# Altium PCB SmartTape.PcbDoc (part 2 of 2)
Units mm, origin at the board's own origin, x right, y up, seen from the top; angles counter-clockwise.
Board outline 81 x 35 mm, 2 copper layers (Top Layer, Bottom Layer), stack 1.57 mm thick; 71 components, 53 nets, 304 pads, 117 vias.
Unrouted connection lines stored in the file: 67.
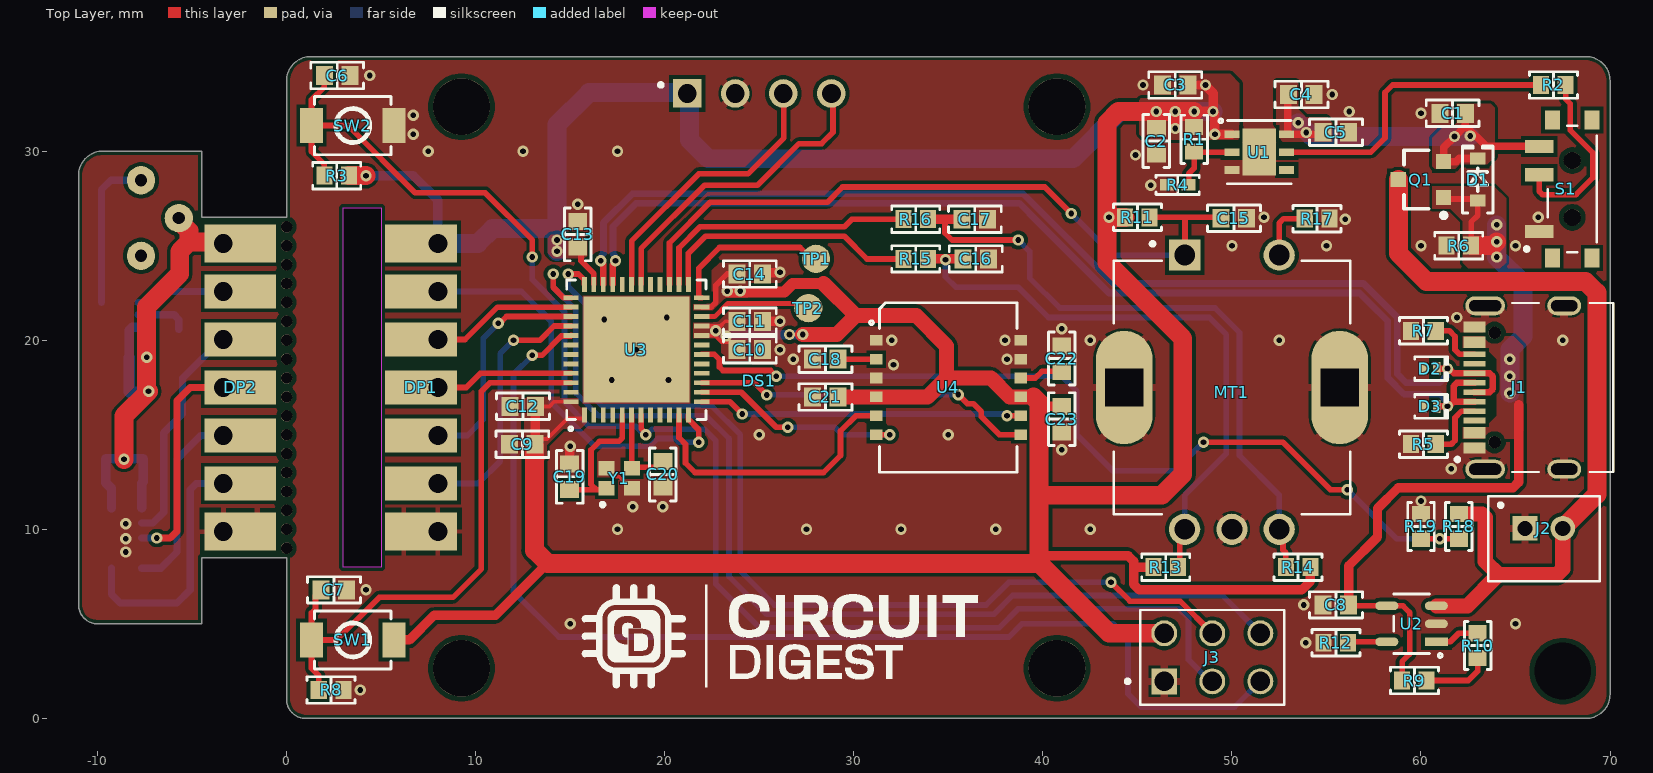
[diagram p0: Top Layer view]

## Via types
v1: diameter 0.6, hole 0.3, Top Layer to Bottom Layer, tented both sides, 117 vias

## Nets (pads, with @x,y where several pads share a name; then routed paths per layer and width w, separated by ;. In a path a pad name is that pad's centre, name@x,y a point inside that pad or via, vN(x,y) a via of type N, cw(c..) or ccw(c..) an arc to the next point about the centre after c; other vN are vias at no path point) (continued)
USB_D_P: (continued)
  Top Layer w0.35: v1(16.614,24.207) 16.614,24.139 16.75,24.004 U3.34 ; D2.2 v1(61.4,18.5) 61.481,18.5 61.731,18.25 J1.B6 63.624,18.25 63.8,18.074 63.8,17.426 63.624,17.25 J1.A6
  Bottom Layer w0.35: v1(16.614,24.207) 16.662,24.254 16.662,24.488 16.762,24.587 16.762,26.219 18.293,27.75 38.957,27.75 43.707,23 56.957,23 58.75,21.207 58.75,18.205 59.205,17.75 61,17.75 61.352,18.102 61.352,18.452 v1(61.4,18.5)
VBUS: C8.2 D1.1 J1.A4_B9 J1.B4_A9 Q1.1 R6.2 R9.2 U2.4 | length 40.6
  Top Layer w0.3: C8.2 56.225,5.95 U2.4 59.05,5.95 59.4,5.6 59.4,3.4 59,3 R9.2 ; Q1.1 61.281,27.469 62.919,27.469 D1.1 63,26.6 62.65,26.25 R6.2
  Top Layer w0.5: C8.2 56.175,8.075 57.7,9.6 57.7,11.1 58.8,12.2 64.866,12.2 65.159,12.493 65.159,16.589
  Top Layer w1: R6.2 63.8,25 v1(64,25.2)
  Bottom Layer w1: v1(64,26.1) v1(64,24.4) 65.4,23 65.4,20.2 64.7,19.5 v1(64.7,19) v1(64.7,18.1) v1(64.7,17.2)
VDD: C1.2 C4.2 C5.2 D1.2 Q1.2 S1.3 U1.6 | length 22.8
  Top Layer w0.4: C4.2 52.945,32.945 52.945,30.904 52.942,30.9 U1.6 52.894,30.904 53.812,30.904 54.729,30.904 C5.2 ; C1.2 62.35,31.35 ; D1.2 62.013,29.613 61.85,29.45 Q1.2 61.2,30.2 v1(61.775,30.775) 62.35,31.35 ; S1.3 63.45,30.25 62.35,31.35
  Bottom Layer w1: v1(53.5,31.5) 54.225,30.775 v1(61.775,30.775) 62.575,30.775 v1(62.6,30.8)
  other v1: 53.93,30.984
XSHUT: DP1.6 U3.40 | length 13.8
  Top Layer w0.3: v1(12,20) 13.4,20 14.15,20.75 U3.40
  Bottom Layer w0.3: DP1.6@8,12.42 10.12,12.42 11.3,13.6 11.3,19.3 v1(12,20)
pads on no net: DS1. J1. J1.A8 J1.B8 LD1.2 S1. S1.S1 S1.S2 S1.S3 S1.S4 U1.4 U3.2 U3.3 U3.4 U3.8 U3.9 U3.10 U3.16 U3.17 U3.19 U3.28 U3.29 U3.32 U3.42 U3.43 U3.44 U3.47 U5.8 U6.4

## Polygon pours and split planes (outlines as drawn)
VDD on Top Layer "GND_PLANE" (solid, remove dead copper, pour order 0): 61.9,32.5 63.7,32.5 63.9,32.3 63.9,29.7 63.5,29.3 62.037,29.3 61.8,29.063 60.737,29.063 60.6,29.2 60.6,30.7 61.099,31.199 61.599,31.199 61.9,31.5
3V3 on Top Layer "GND_PLANE" (solid, remove dead copper, pour order 2): 21.5,21.9 22.2,21.9 22.5,22.2 22.5,23.7 22.9,24.1 24.4,24.1 24.4,18.9 23.2,18.9 23,19.1 23,19.9 22.8,20.1 21.5,20.1
3V3 on Top Layer "GND_PLANE" (solid, remove dead copper, pour order 3): 15.9,24.475 15.9,25.375 15.7,25.575 13.976,25.575 13.8,25.399 13.8,24.591 14.066,24.325 15.75,24.325
3V3 on Top Layer "GND_PLANE" (solid, remove dead copper, pour order 5): 12.725,17 15.35,17 15.425,16.925 15.425,16.55 15.55,16.425 15.875,16.425 15.875,15.625 15.569,15.319 14.619,15.319 13.75,14.45 13.75,13.775 13.625,13.65 12.725,13.65 12.5,13.875 12.575,13.95 12.575,16.875
3V3 on Top Layer "GND_PLANE" (solid, remove dead copper, pour order 7): 47.2,33 47.2,34.1 49.9,34.1 50.4,33.6 50.4,30.676 50.324,30.6 45.4,30.6 45.1,30.9 45.1,32.7 45.186,32.786 46.986,32.786
VDD on Top Layer "GND_PLANE" (solid, remove dead copper, pour order 8): 52.35,33.7 52.35,30.85 52.7,30.5 54.4,30.5 55.3,30.5 55.3,31.5 55.017,31.783 53.924,31.783 53.5,32.207 53.5,33.6 53.4,33.7
VBUS on Top Layer "VBUS" (solid, remove dead copper, pour order 9): 60.6,28.15 63.85,28.15 64.5,27.5 64.5,24.109 64.191,23.8 62.5,23.8 62.2,24.1 62.2,26.3 61.55,26.95 60.6,26.95
GND on Top Layer "GND_PLANE" (solid, remove dead copper, pour order 12): 0,34 cw(c1,34) 1,35 68.5,35 cw(c68.5,33.5) 70,33.5 70,1.5 cw(c68.5,1.5) 68.5,0 1,0 cw(c1,1) 0,1
AGND on Top Layer "GND_PLANE" (solid, remove dead copper, pour order 11): 0,26.5 -4.5,26.5 -4.5,30 -10,30 ccw(c-10,29) -11,29 -11,6 ccw(c-10,6) -10,5 -4.5,5 -4.5,8.5 0,8.5
VBUS on Top Layer "GND_PLANE" (solid, remove dead copper, pour order 10): 62.2,14.8 65,14.8 65.4,15.2 65.4,19.7 64.9,20.2 62.2,20.2 62.2,19.6 63.4,19.6 64,19 64,16 63.4,15.4 62.2,15.4
3V3 on Bottom Layer "GND_PLANE" (solid, remove dead copper, pour order 1): 21.5,21.9 22.2,21.9 22.5,22.2 22.5,23.7 22.9,24.1 24.4,24.1 24.4,18.9 23.2,18.9 23,19.1 23,19.9 22.8,20.1 21.5,20.1
GND on Bottom Layer "GND_PLANE" (solid, remove dead copper, pour order 6): 0,34 cw(c1,34) 1,35 68.5,35 cw(c68.5,33.5) 70,33.5 70,1.5 cw(c68.5,1.5) 68.5,0 1,0 cw(c1,1) 0,1
AGND on Bottom Layer "GND_PLANE" (solid, remove dead copper, pour order 4): 0,26.5 -4.5,26.5 -4.5,30 -10,30 ccw(c-10,29) -11,29 -11,6 ccw(c-10,6) -10,5 -4.5,5 -4.5,8.5 0,8.5

## Silkscreen, mask and mechanical layers (free items; w line width, h text height)
Top Overlay:
  drawing of 17 lines, arcs and shapes, not listed
Bottom Overlay:
  text "3V3" at 21.6,31.35 h0.7 r90
  text "GND" at 24.1,31.35 h0.7 r90
  text "SCL" at 26.6,31.35 h0.7 r90
  text "SDA" at 29.1,31.35 h0.7 r90
  text "RESET" at 4.85,31.15 h0.7
  text "3V3" at 46.15,11.65 h0.7 r270
  text "SWDIO" at 48.65,11.65 h0.7 r270
  text "SWCLK" at 51.15,11.65 h0.7 r270
  text "-" at 65.912,8.051 h0.7
  text "+" at 67.85,8.033 h0.7
  text "GND" at 46.15,6.15 h0.7 r270
  text "NRST" at 48.65,6.15 h0.7 r270
  text "SWO" at 51.15,6.15 h0.7 r270
  text "BOOT" at 4.85,3.65 h0.7
Mechanical 1:
  lines w0.2: -11,6 ccw(c-10,6) -10,5 -4.5,5 -4.5,8.5 0,8.5 0,1 ccw(c1,1) 1,0 68.73,0 ccw(c68.73,1.27) 70,1.27 70,33.73 ccw(c68.73,33.73) 68.73,35 1.27,35 ccw(c1.27,33.73) 0,33.73 0,26.5 -4.5,26.5 -4.5,30 -9.73,30 ccw(c-9.73,28.73) -11,28.73 -11,6 ; 3,8 3,27 5,27 5,8 3,8

## Text inside footprints (layer, text, board x,y; h text height)
U3: Mechanical 13 "*" at 16.134,16.134 h1.27 r90